# Altium PCB Gastroscopy-CutController.PcbDoc (part 2 of 3)
Units mm, origin at the board's own origin, x right, y up, seen from the top; angles counter-clockwise.
Board outline 69.5 x 69.5 mm, 4 copper layers (Top Layer, Layer 4 (GND), Layer 5 (PWR), Bottom Layer), stack 1.49 mm thick; 92 components, 63 nets, 304 pads, 96 vias.
Unrouted connection lines stored in the file: 142.
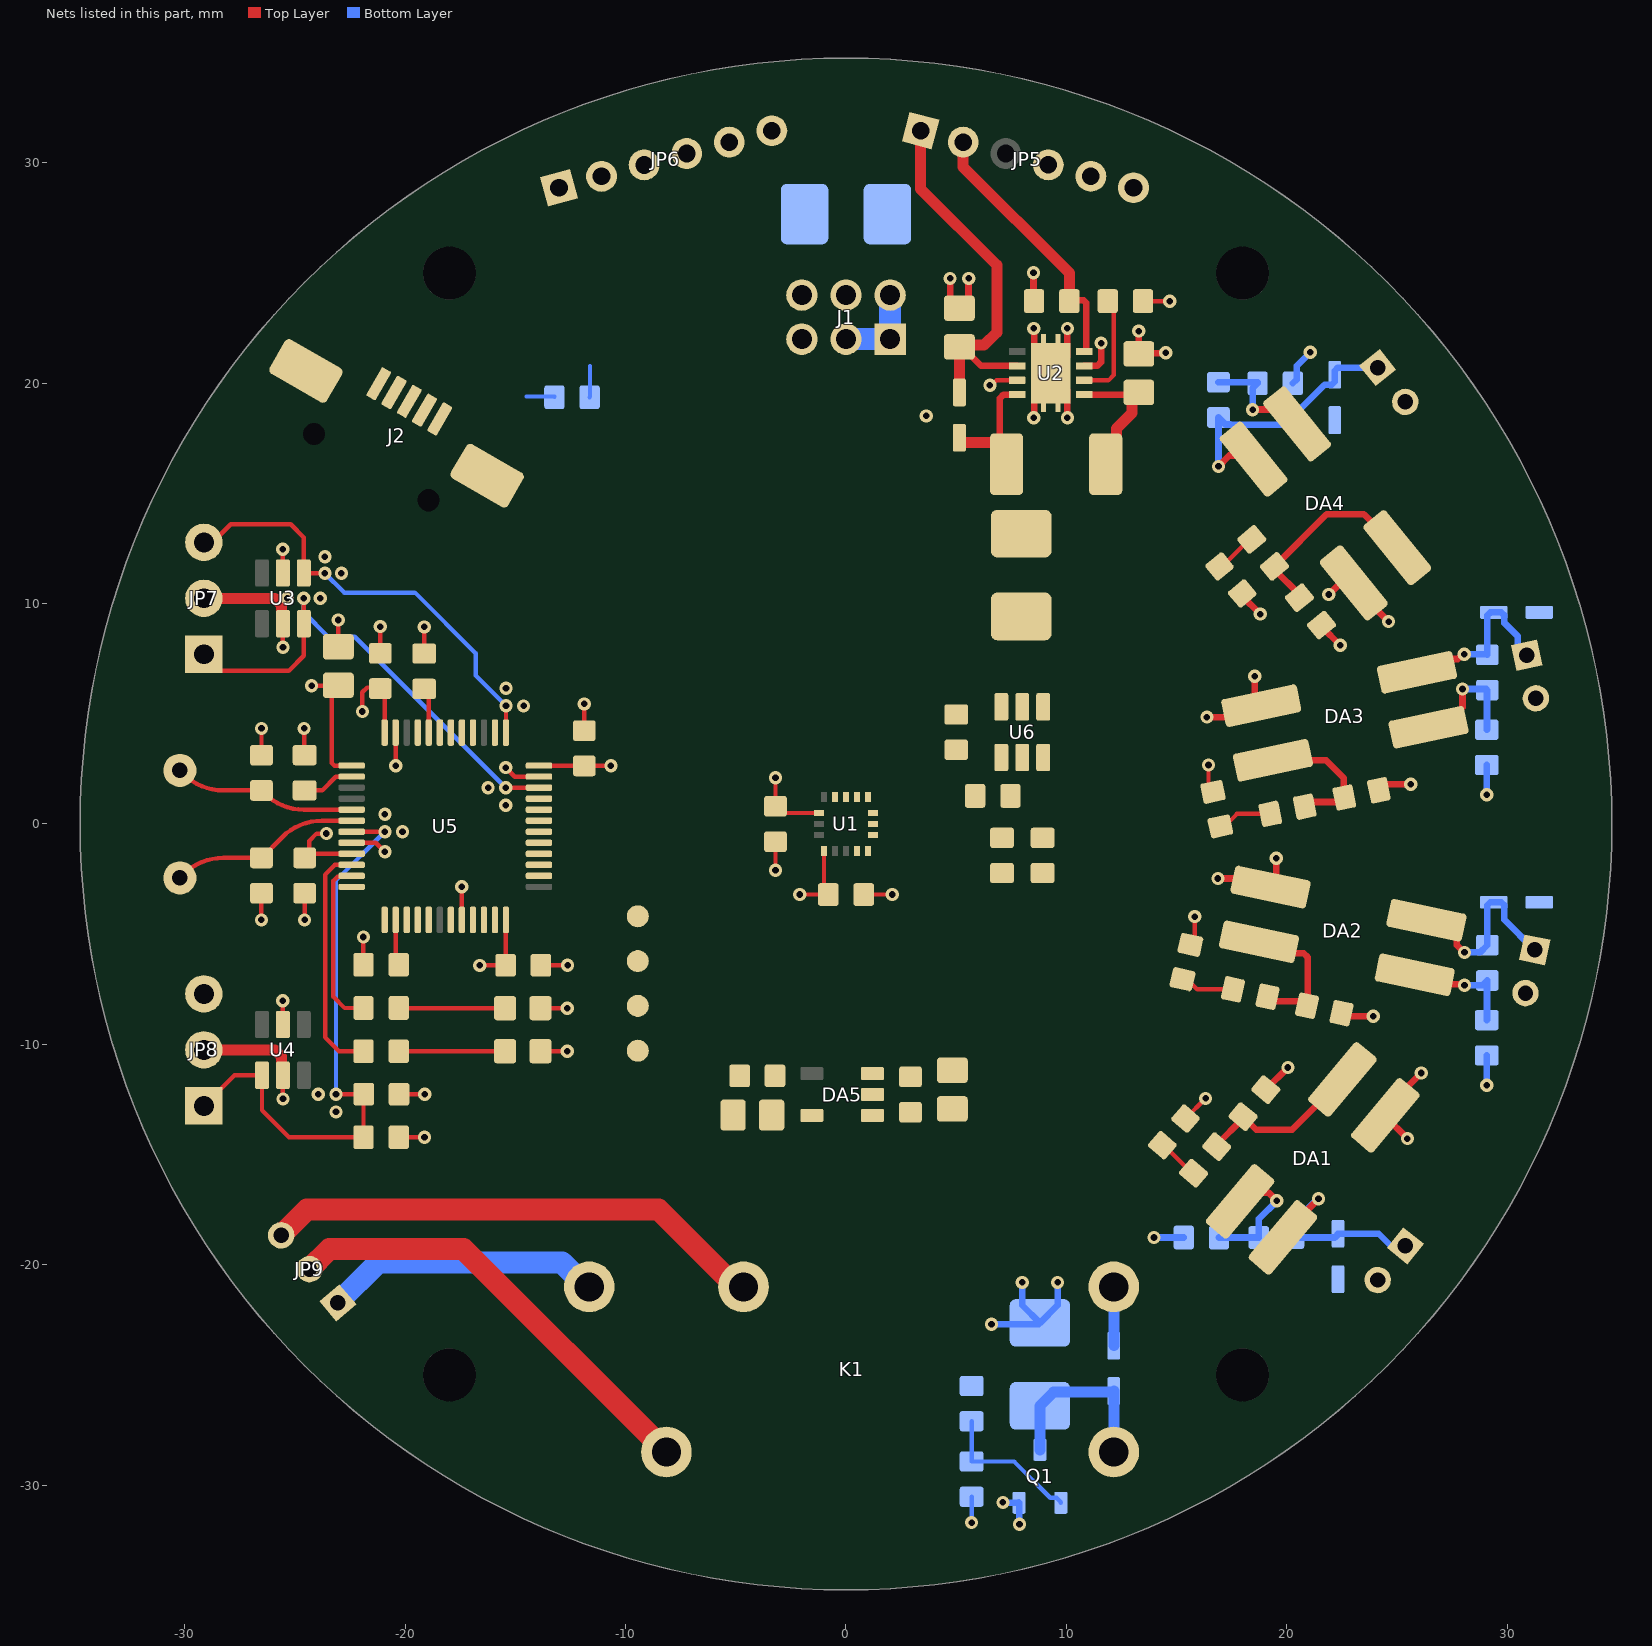
[diagram p2: the nets of this part, all layers, seen from the top]

## Part data (continued)
D1 D2 D3 D4: library part PESD5V0L1BA,115, "TVS DIODE 5VWM 33VC SOD323", Breakdown Voltage=7V, Capacitance=75pF, Clamping Voltage=33V, Leakage Current=1uA, Manufacturer 1="NXP Semiconductors", Max Breakdown Voltage=8.2V, Max Operating Temperature=150°C, Max Power Dissipation=500W, Max Surge Current=15A, Min Operating Temperature=-65°C, Operating Supply Voltage=5V, Package Quantity=1, Power Line Protection=No, Resistor Type=Zener, Supplier Part Number 1=70R7330, Test Current=5mA, Category=Uncategorized, Clamping Voltage-Max=33V, ComponentLink1Description=https://datasheet.ciiva.com/334/pesdxl1ba-ser-334048.pdf?src-supplier=Digi-Key, ComponentLink1URL=https://datasheet.ciiva.com/334/pesdxl1ba-ser-334048.pdf?src-supplier=Digi-Key, ComponentLink2Description=https://datasheet.ciiva.com/1219/682594-1219455.pdf?src-supplier=Newark, ComponentLink2URL=https://datasheet.ciiva.com/1219/682594-1219455.pdf?src-supplier=Newark, ComponentLink3Description=https://datasheet.ciiva.com/334/pesdxl1ba-ser-334050.pdf?src-supplier=Digi-Key, ComponentLink3URL=https://datasheet.ciiva.com/334/pesdxl1ba-ser-334050.pdf?src-supplier=Digi-Key, ComponentLink4Description=https://datasheet.ciiva.com/334/pesdxl1ba-ser-334051.pdf?src-supplier=Digi-Key, ComponentLink4URL=https://datasheet.ciiva.com/334/pesdxl1ba-ser-334051.pdf?src-supplier=Digi-Key, ComponentLink5Description=https://datasheet.ciiva.com/6574/pesdxl1ba-ser-6574197.pdf?src-supplier=Digi-Key, ComponentLink5URL=https://datasheet.ciiva.com/6574/pesdxl1ba-ser-6574197.pdf?src-supplier=Digi-Key, Contact Plating=Tin, Depth=1.35mm, Diode Type=ZENER, Direction=Bidirectional, Element Configuration=Single, Height=0.25inch, Lead Free="Lead Free", Length=1.8mm, Manufacturer Part Number 1=PESD5V0L1BA115, Min Breakdown Voltage=7V, Mount="Surface Mount", Number of Bidirectional Channels=1, Number of Channels=1, Number of Elements=1, Number of pins=2, Packaging="Cut Tape", Peak Pulse Current=15A, Peak Pulse Power=500W, Polarity=Bidirectional, Radiation Hardening=No, Reach SVHC Compliant=Yes, Reverse Breakdown Voltage=7V, Reverse Standoff Voltage=5V, RoHS=Yes, Series=-, Supplier 1=Newark, Termination=SMD/SMT, Weight=0.01lb, Width=0.25inch, Working Voltage=5V
D5 D8: "DIODE SCHOTTKY 40V 1A SOD323", Manufacturer=Nexperia, Supplier Part Number 1=485644P, Category="Rectifier Diodes", ComponentLink1Description=http://www.farnell.com/datasheets/689588.pdf?src-supplier=Farnell, ComponentLink1URL=http://www.farnell.com/datasheets/689588.pdf?src-supplier=Farnell, Manufacturer Part Number=PMEG4010BEA,115, Pricing 1="160=0,18400, 760=0,16200, 1500=0,13800 (GBP)", RoHS=Yes, RoHS Compliant=Yes, Stock 1=163320, Supplier 1=RSComponents
D6: "LED BLUE CLEAR CHIP SMD", Case Code (Imperial)=0603, Case Code (Metric)=1608, Color=Blue, Forward Current=20mA, Forward Voltage=2.8V, Lens Color=Colorless, Manufacturer 1="Vishay Lite-On", Max Operating Temperature=80°C, Min Operating Temperature=-20°C, Package Quantity=1, Power Dissipation=76mW, Reverse Voltage=5V, Test Current=5mA, Case/Package=0603, Category=LEDs, ComponentLink1Description=https://datasheet.ciiva.com/2111/ltst-c193tbkt-5a-2111219.pdf?src-supplier=Digi-Key, ComponentLink1URL=https://datasheet.ciiva.com/2111/ltst-c193tbkt-5a-2111219.pdf?src-supplier=Digi-Key, ComponentLink2Description=https://datasheet.ciiva.com/11773/0900766b80dc0554-11773880.pdf?src-supplier=RSComponents, ComponentLink2URL=https://datasheet.ciiva.com/11773/0900766b80dc0554-11773880.pdf?src-supplier=RSComponents, ComponentLink3Description=https://datasheet.ciiva.com/4688/lite-on-ltst-c193tbkt-5a-187386-4688832.pdf?src-supplier=Mouser, ComponentLink3URL=https://datasheet.ciiva.com/4688/lite-on-ltst-c193tbkt-5a-187386-4688832.pdf?src-supplier=Mouser, ComponentLink4Description=https://datasheet.ciiva.com/16210/ltst-c193tbkt-5a-16210824.pdf?src-supplier=Future+Electronics, ComponentLink4URL=https://datasheet.ciiva.com/16210/ltst-c193tbkt-5a-16210824.pdf?src-supplier=Future+Electronics, ComponentLink5Description=https://datasheet.ciiva.com/15201/getdatasheetpartid-293056-15201395.pdf?src-supplier=Verical, ComponentLink5URL=https://datasheet.ciiva.com/15201/getdatasheetpartid-293056-15201395.pdf?src-supplier=Verical, ComponentLink6Description=https://datasheet.ciiva.com/2111/p-100-ltst-c193tbkt-5a-2111220.pdf?src-supplier=Digi-Key, ComponentLink6URL=https://datasheet.ciiva.com/2111/p-100-ltst-c193tbkt-5a-2111220.pdf?src-supplier=Digi-Key, ComponentLink7Description=https://datasheet.ciiva.com/2111/p-100-ltst-c193tbkt-5a-2111221.pdf?src-supplier=Digi-Key, ComponentLink7URL=https://datasheet.ciiva.com/2111/p-100-ltst-c193tbkt-5a-2111221.pdf?src-supplier=Digi-Key, Depth=0.8mm, Dominant Wavelength=475nm, Height=0.35mm, Illumination Color=Blue, Lead Free="Lead Free", Length=1.6mm, Lens Style=Diffused,Colorless,Rectangular,Clear, Lens Transparency=Clear, Luminous Intensity=15mcd, Manufacturer Part Number 1=LTST-C193TBKT-5A, Mount="Surface Mount", Number of Elements=1, Number of LEDs=1, Number of pins=2, Packaging="Tape and Reel", Pricing 1="1=0.33280, 10=0.16780, 25=0.16610 (USD)", Radiation Hardening=No, RoHS=Yes, RoHS Compliant=Yes, Stock 1=226, Supplier 1="Arrow Electronics", Supplier Part Number 1=LTST-C193TBKT-5A, Viewing Angle=130°, Width=0.8mm
D7: "LED GREEN CLEAR SMD", Case Code (Imperial)=0603, Case Code (Metric)=1608, Color=Green, Forward Current=30mA, Forward Voltage=2V, Lens Color=Colorless, Manufacturer 1="Vishay Lite-On", Max Operating Temperature=85°C, Max Power Dissipation=75mW, Min Operating Temperature=-55°C, Package Quantity=1, Reverse Voltage=5V, Test Current=20mA, Case/Package=0603, Category=LEDs, ComponentLink1Description=https://datasheet.ciiva.com/2109/ltst-c191kgkt-2109973.pdf?src-supplier=Digi-Key, ComponentLink1URL=https://datasheet.ciiva.com/2109/ltst-c191kgkt-2109973.pdf?src-supplier=Digi-Key, Depth=0.8mm, Dominant Wavelength=571nm, Height=0.55mm, Illumination Color=Green, Lead Free="Lead Free", Length=1.6mm, Lens Style=Rectangular,Colorless, Lens Transparency=Clear, Luminous Intensity=35mcd, Manufacturer Part Number 1=LTST-C191KGKT, Mount="Surface Mount", Number of Elements=1, Number of LEDs=1, Number of pins=2, Packaging="Tape and Reel", Power Dissipation=75mW, Power Rating=75mW, Pricing 1="5000=0.04240, 10000=0.03360, 25000=0.02880, 50000=0.02750 (USD)", Radiation Hardening=No, RoHS=Yes, RoHS Compliant=Yes, Stock 1=10000, Supplier 1="Arrow Electronics", Supplier Part Number 1=LTST-C191KGKT, Viewing Angle=130°, Wavelength=574nm, Width=0.8mm
D9: "TVS DIODE 24VWM 38.9VC SMB", Breakdown Voltage=30.7V, Case/Package=SMB, Clamping Voltage=38.9V, Leakage Current=5uA, Manufacturer 1=Bourns, Max Operating Temperature=150°C, Max Power Dissipation=600W, Max Surge Current=100A, Min Breakdown Voltage=26.7V, Min Operating Temperature=-55°C, Operating Supply Voltage=3.5V, Package Quantity=1, Peak Pulse Current=15.4A, Power Line Protection=No, Resistor Type=Zener, Reverse Standoff Voltage=24V, Test Current=1mA, Category="TVS Diodes", ComponentLink1Description=https://datasheet.ciiva.com/30478/0900766b81189a19-30478832.pdf?src-supplier=RSComponents, ComponentLink1URL=https://datasheet.ciiva.com/30478/0900766b81189a19-30478832.pdf?src-supplier=RSComponents, ComponentLink2Description=https://datasheet.ciiva.com/3022/smbj-3022496.pdf?src-supplier=Avnet, ComponentLink2URL=https://datasheet.ciiva.com/3022/smbj-3022496.pdf?src-supplier=Avnet, ComponentLink3Description=https://datasheet.ciiva.com/3022/smbj-3022497.pdf?src-supplier=Avnet, ComponentLink3URL=https://datasheet.ciiva.com/3022/smbj-3022497.pdf?src-supplier=Avnet, ComponentLink4Description=https://datasheet.ciiva.com/342/smbj-342022.pdf?src-supplier=Digi-Key, ComponentLink4URL=https://datasheet.ciiva.com/342/smbj-342022.pdf?src-supplier=Digi-Key, ComponentLink5Description=https://datasheet.ciiva.com/8031/1677318-8031064.pdf?src-supplier=Element14, ComponentLink5URL=https://datasheet.ciiva.com/8031/1677318-8031064.pdf?src-supplier=Element14, ComponentLink6Description=https://datasheet.ciiva.com/330/littelfuse-tvs-diode-smaj-datasheet-pdf-330796.pdf?src-supplier=Digi-Key, ComponentLink6URL=https://datasheet.ciiva.com/330/littelfuse-tvs-diode-smaj-datasheet-pdf-330796.pdf?src-supplier=Digi-Key, ComponentLink7Description=https://datasheet.ciiva.com/28410/1677318-28410012.pdf?src-supplier=Element14, ComponentLink7URL=https://datasheet.ciiva.com/28410/1677318-28410012.pdf?src-supplier=Element14, ComponentLink8Description=https://datasheet.ciiva.com/342/smbj-342020.pdf?src-supplier=Digi-Key, ComponentLink8URL=https://datasheet.ciiva.com/342/smbj-342020.pdf?src-supplier=Digi-Key, ComponentLink9Description=https://datasheet.ciiva.com/342/smbj-342021.pdf?src-supplier=Digi-Key, ComponentLink9URL=https://datasheet.ciiva.com/342/smbj-342021.pdf?src-supplier=Digi-Key, ComponentLink10Description=https://datasheet.ciiva.com/16237/smbj-16237468.pdf?src-supplier=Onlinecomponents.com, ComponentLink10URL=https://datasheet.ciiva.com/16237/smbj-16237468.pdf?src-supplier=Onlinecomponents.com, ComponentLink11Description=https://datasheet.ciiva.com/48712/001056314-da-01-en-tvs-diode-smbj24a-do-214aa-bou-48712566.pdf?src-supplier=Conrad, ComponentLink11URL=https://datasheet.ciiva.com/48712/001056314-da-01-en-tvs-diode-smbj24a-do-214aa-bou-48712566.pdf?src-supplier=Conrad, Diode Type=ZENER, Direction=Unidirectional, Element Configuration=Single, ESD Protection=Yes, Height=2.42mm, Length=4.57mm, Manufacturer Part Number 1=SMBJ24A, Max Breakdown Voltage=30.7V, Max Reverse Leakage Current=5uA, Mount="Surface Mount", Number of Channels=1, Number of Elements=1, Number of pins=2, Number of Unidirectional Channels=1, Packaging="Tape and Reel", Peak Pulse Power=600W, Polarity=Unidirectional, Pricing 1="1=0,52680, 10=0,35320 (USD)", Radiation Hardening=No, REACH SVHC="No SVHC", Reverse Breakdown Voltage=26.7V, RoHS=Yes, RoHS Compliant=Yes, Series=SMBJ, Stock 1=14, Supplier 1="Arrow Electronics", Supplier Part Number 1=SMBJ24A, Termination=SMD/SMT, Width=3.94mm
D10 D11: "TVS DIODE 5VWM 9.2VC SMB", Breakdown Voltage=7.25V, Case/Package=DO-214AA, Clamping Voltage=9.2V, Leakage Current=1.6mA, Manufacturer 1=Bourns, Max Operating Temperature=150°C, Max Power Dissipation=600W, Max Surge Current=100A, Min Breakdown Voltage=6.4V, Min Operating Temperature=-55°C, Operating Supply Voltage=3.5V, Package Quantity=1, Peak Pulse Current=65.2A, Power Line Protection=No, Resistor Type=Zener, Reverse Standoff Voltage=5V, Test Current=10mA, Category="TVS Diodes", ComponentLink1Description=https://datasheet.ciiva.com/334/smbj-334706.pdf?src-supplier=Digi-Key, ComponentLink1URL=https://datasheet.ciiva.com/334/smbj-334706.pdf?src-supplier=Digi-Key, ComponentLink2Description=https://datasheet.ciiva.com/3022/smbj-3022578.pdf?src-supplier=Avnet, ComponentLink2URL=https://datasheet.ciiva.com/3022/smbj-3022578.pdf?src-supplier=Avnet, ComponentLink3Description=https://datasheet.ciiva.com/334/smbj-334707.pdf?src-supplier=Digi-Key, ComponentLink3URL=https://datasheet.ciiva.com/334/smbj-334707.pdf?src-supplier=Digi-Key, ComponentLink4Description=https://datasheet.ciiva.com/334/smbj-334708.pdf?src-supplier=Digi-Key, ComponentLink4URL=https://datasheet.ciiva.com/334/smbj-334708.pdf?src-supplier=Digi-Key, ComponentLink5Description=https://datasheet.ciiva.com/28410/1677318-28410120.pdf?src-supplier=Element14, ComponentLink5URL=https://datasheet.ciiva.com/28410/1677318-28410120.pdf?src-supplier=Element14, ComponentLink6Description=https://datasheet.ciiva.com/8031/1677318-8031161.pdf?src-supplier=Element14, ComponentLink6URL=https://datasheet.ciiva.com/8031/1677318-8031161.pdf?src-supplier=Element14, ComponentLink7Description=https://datasheet.ciiva.com/30104/smbj-30104446.pdf?src-supplier=Onlinecomponents.com, ComponentLink7URL=https://datasheet.ciiva.com/30104/smbj-30104446.pdf?src-supplier=Onlinecomponents.com, Diode Type=ZENER, Direction=Bidirectional, Element Configuration=Single, Manufacturer Part Number 1=SMBJ5.0CA, Max Breakdown Voltage=7.25V, Max Reverse Leakage Current=1.6mA, Mount="Surface Mount", Number of Bidirectional Channels=1, Number of Channels=1, Number of Elements=1, Number of pins=2, Packaging="Tape and Reel", Peak Pulse Power=600W, Polarity=Bidirectional, Pricing 1="3000=0,10850, 6000=0,10460, 15000=0,10360, 30000=0,10260 (USD)", Radiation Hardening=No, REACH SVHC="No SVHC", Reverse Breakdown Voltage=6.4V, RoHS=Yes, RoHS Compliant=Yes, Series=SMBJ, Stock 1=3000, Supplier 1="Arrow Electronics", Supplier Part Number 1=SMBJ5.0CA, Termination=SMD/SMT
DA1 DA2 DA3 DA4: "OPTOISOLATOR 5KV TRANSISTOR 4SMD", Case/Package=SMD/SMT, Collector Emitter Breakdown Voltage=70V, Collector Emitter Saturation Voltage=200mV, Collector Emitter Voltage (VCEO)=35V, Current Transfer Ratio=400%, Forward Current=50mA, Forward Voltage=1.2V, Input Current=20mA, Isolation Voltage=5kV, Manufacturer 1="Broadcom Avago", Max Operating Temperature=100°C, Max Power Dissipation=200mW, Min Operating Temperature=-30°C, Package Quantity=1000, Reverse Breakdown Voltage=6V, Supplier Part Number 1=630-HCPL-817-50CE, Approvals=UL, Category=Optocouplers, Collector-emitter Voltage-Max=200mV, ComponentLink1Description=https://datasheet.ciiva.com/32424/hcpl-817-00ae-eng-tds-32424469.pdf?src-supplier=Distrelec, ComponentLink1URL=https://datasheet.ciiva.com/32424/hcpl-817-00ae-eng-tds-32424469.pdf?src-supplier=Distrelec, ComponentLink2Description=https://datasheet.ciiva.com/4702/v02-0265en-106799-4702156.pdf?src-supplier=Mouser, ComponentLink2URL=https://datasheet.ciiva.com/4702/v02-0265en-106799-4702156.pdf?src-supplier=Mouser, Fall Time=18000ns, Input Type=DC, Lead Free="Lead Free", Manufacturer Part Number 1=HCPL-817-50CE, Max Collector Current=50mA, Max Input Current=50mA, Max Output Voltage=70V, Mount="Surface Mount", Number of Channels=1, Number of Circuits=1, Number of Elements=1, Number of pins=4, Output Current per Channel=50mA, Output Voltage=70V, Packaging="Tape and Reel", Power Dissipation=200mW, Pricing 1="1=0,55000, 10=0,35900, 50=0,35900, 100=0,23700, 1000=0,18200, 10000=0,15000 (USD)", Rise Time=18000ns, RoHS=Yes, RoHS Compliant=Yes, Series=-, Stock 1=53747, Supplier 1=Mouser
DA5: "IC REG LINEAR 3.3V 500MA SOT23-5", Case/Package=SOT-23-5, Dropout Voltage=238mV, Manufacturer 1="Texas Instruments", Max Input Voltage=5.5V, Max Operating Temperature=125°C, Max Output Voltage=3.3V, Min Operating Temperature=-40°C, Output Current=500mA, Power Supply Rejection Ratio (PSRR)=52dB, Quiescent current=31uA, Supplier Part Number 1=595-TLV75533PDBVR, Category="Voltage Regulators - Linear", ComponentLink1Description=http://www.ti.com/lit/ds/symlink/tlv755p.pdf?src-supplier=Digi-Key, ComponentLink1URL=http://www.ti.com/lit/ds/symlink/tlv755p.pdf?src-supplier=Digi-Key, ComponentLink2Description=http://www.ti.com/general/docs/suppproductinfo.tsp?distId=10&amp;gotoUrl=http%3A%2F%2Fwww.ti.com%2Flit%2Fgpn%2Ftlv755p&src-supplier=Digi-Key, ComponentLink2URL=http://www.ti.com/general/docs/suppproductinfo.tsp?distId=10&amp;gotoUrl=http%3A%2F%2Fwww.ti.com%2Flit%2Fgpn%2Ftlv755p&src-supplier=Digi-Key, Manufacturer Part Number 1=TLV75533PDBVR, Min Output Voltage=3.3V, Mount="Surface Mount", Number of Regulators=1, Output Configuration=Positive, Output Type=Fixed, Packaging="Cut Tape", Pricing 1="1=0,46000, 10=0,39400, 50=0,39400, 100=0,27300, 1000=0,17900, 10000=0,16200 (USD)", RoHS=Yes, RoHS Compliant=Yes, Stock 1=90, Supplier 1=Mouser
J1: "CONN HEADER VERT 6POS 2MM", Manufacturer 1="Connfly electronic (Zhenqin)", Contact_1=+5V, Contact_2=+5V, Contact_3=+5V, Contact_4=GND, Contact_5=GND, Contact_6=GND, Manufacturer Part Number 1=DS1026-06-2*3S8BV
J2: "CONN RCPT USB2.0 MINI B SMD R/A", Manufacturer 1="Adam Equipment", Category=Connectors, Contact Plating=Gold, Manufacturer Part Number 1=MUSB-B5-S-VT-TSMT-1, Orientation=Vertical
JP1 JP2 JP3 JP4: "CONN HEADER 2POS 2MM", Manufacturer 1="Connfly electronic (Zhenqin)", Contact_1=IN, Contact_2=GND, Manufacturer Part Number 1=DS1066-2MVW6X
JP5 JP6: "CONN PLUG 6POS 2MM", Manufacturer 1="Connfly electronic (Zhenqin)", Contact_6=GND, Manufacturer Part Number 1=DS1066-6MVW6X
  JP5: Contact_1=DRIVE_OUT, Contact_2=DRIVE_IN, Contact_3=NC, Contact_4=LED_DIM, Contact_5=5V
  JP6: Contact_1=SDA, Contact_2=SCL, Contact_3=INT, Contact_4=TOF_EN, Contact_5=3V3
JP7 JP8: "CONN HEADER 3 POS 2.54", Color=Black, Manufacturer 1="Wurth Electronics", Supplier Part Number 1=732-5316-ND, Category=Connectors, ComponentLink1Description=http://www.mouser.com/ds/2/445/6130xx11121-538006.pdf?src-supplier=Mouser, ComponentLink1URL=http://www.mouser.com/ds/2/445/6130xx11121-538006.pdf?src-supplier=Mouser, ComponentLink2Description=http://www.farnell.com/cad/1737268.pdf?src-supplier=Element14, ComponentLink2URL=http://www.farnell.com/cad/1737268.pdf?src-supplier=Element14, ComponentLink3Description=https://katalog.we-online.de/em/datasheet/6130xx11121.pdf?src-supplier=Digi-Key, ComponentLink3URL=https://katalog.we-online.de/em/datasheet/6130xx11121.pdf?src-supplier=Digi-Key, Connector Type="Male Pin", Contact Material=Copper, Contact Mating Length=0.236inch, Contact Plating=Gold, Contact Type="Male Pin", Contact_2=GND, Gender=Male, Lead Free="Lead Free", Manufacturer Part Number 1=61300311121, Mount="Through Hole", Number of Contacts=3, Number of Positions=3, Number of Rows=1, Packaging=Bulk, Pitch=0.1inch, Pricing 1="1=0,13000, 10=0,11300, 25=0,09400, 50=0,07900, 100=0,07100, 1000=0,06600 (USD)", RoHS=Yes, RoHS Compliant=Yes, Series=WR-PHD, Stock 1=199897, Supplier 1=Digi-Key, Termination=Solder
  JP7: Contact_1=SWDIO, Contact_3=SWCLK
  JP8: Contact_1=RESET, Contact_3=3V3
JP9: "CONN PLUG 3POS 2MM", Manufacturer 1="Connfly electronic (Zhenqin)", Contact_1=NO, Contact_2=COM, Contact_3=NC, Manufacturer Part Number 1=DS1066-3MVW6X
K1: "RELAY GEN PURPOSE SPDT 10A 5V", Manufacturer 1="TE Connectivity Schrack", Supplier Part Number 1=RT174005, Category="Signal Relays", ComponentLink1Description=https://datasheet.ciiva.com/2409/eng-ds-rt1-sensitive-0910-2409155.pdf?src-supplier=Avnet, ComponentLink1URL=https://datasheet.ciiva.com/2409/eng-ds-rt1-sensitive-0910-2409155.pdf?src-supplier=Avnet, ComponentLink2Description=https://datasheet.ciiva.com/14146/rt1sens-eng-datasheet-14146563.pdf?src-supplier=Distrelec, ComponentLink2URL=https://datasheet.ciiva.com/14146/rt1sens-eng-datasheet-14146563.pdf?src-supplier=Distrelec, ComponentLink3Description=https://datasheet.ciiva.com/16307/3-1393239-6-16307647.pdf?src-supplier=Future+Electronics, ComponentLink3URL=https://datasheet.ciiva.com/16307/3-1393239-6-16307647.pdf?src-supplier=Future+Electronics, ComponentLink4Description=https://datasheet.ciiva.com/14190/eng-ds-rt1-sensitive-0411-14190113.pdf?src-supplier=Avnet, ComponentLink4URL=https://datasheet.ciiva.com/14190/eng-ds-rt1-sensitive-0411-14190113.pdf?src-supplier=Avnet, ComponentLink5Description=https://datasheet.ciiva.com/30127/eng-ds-rt1-sensitive-0411-30127511.pdf?src-supplier=Onlinecomponents.com, ComponentLink5URL=https://datasheet.ciiva.com/30127/eng-ds-rt1-sensitive-0411-30127511.pdf?src-supplier=Onlinecomponents.com, Manufacturer Part Number 1=3-1393239-6, Pricing 1="1=1,30120 (USD)", RoHS=Yes, Stock 1=3333, Supplier 1="Arrow Electronics"
L1: library part NLC453232T-4R7K-PF, "FIXED IND 4.7UH 650MA 270MOHM SM", Case Code (Imperial)=1812, Case Code (Metric)=4532, Current Rating=650mA, DC Resistance (DCR)=270mR, Inductance Tolerance=10%, Inductor Type=POWER, Manufacturer=TDK, Max Operating Temperature=105°C, Min Operating Temperature=-40°C, Package Quantity=500, Resistor Type=Wirewound, Self Resonant Frequency=35MHz, Test Frequency=7.96MHz, Case/Package=1812, Category="Fixed Inductors", ComponentLink1Description=https://datasheet.ciiva.com/15160/getdatasheetpartid-200345-15160695.pdf?src-supplier=Verical, ComponentLink1URL=https://datasheet.ciiva.com/15160/getdatasheetpartid-200345-15160695.pdf?src-supplier=Verical, ComponentLink2Description=https://datasheet.ciiva.com/49516/1871457-49516870.pdf?src-supplier=Jameco, ComponentLink2URL=https://datasheet.ciiva.com/49516/1871457-49516870.pdf?src-supplier=Jameco, ComponentLink3Description=https://datasheet.ciiva.com/22622/1505805-22622665.pdf?src-supplier=Element14, ComponentLink3URL=https://datasheet.ciiva.com/22622/1505805-22622665.pdf?src-supplier=Element14, ComponentLink4Description=https://datasheet.ciiva.com/15987/e531-nlc4532-15987565.pdf?src-supplier=Onlinecomponents.com, ComponentLink4URL=https://datasheet.ciiva.com/15987/e531-nlc4532-15987565.pdf?src-supplier=Onlinecomponents.com, Core Material=Ferrite, DC Current=650mA, Depth=3.4mm, Height=3.2mm, Height - Seated (Max)=0.134inch, Inductance=4.7uH, Lead Free="Lead Free", Length=4.8mm, Manufacturer Part Number=NLC453232T-4R7K-PF, Max DC Current=650mA, Military Standard=Not, Mount="Surface Mount", Number of pins=2, Packaging="Tape and Reel", Pricing 1="500=0,20930, 1000=0,16890 (USD)", Q Factor=10, Radiation Hardening=No, Rated Current-Max=650mA, Reach SVHC Compliant=Yes, Resistance=270mR, RoHS=Yes, RoHS Compliant=Yes, Series=NLC, Shielding=Unshielded, Stock 1=6500, Supplier 1="Arrow Electronics", Supplier Part Number 1=NLC453232T-4R7K-PF, Termination=SMD/SMT, Tolerance=10%, Weight=180mg, Width=0.126inch
Q1: "MOSFET N-CH 30V 3.3A/3.6A SOT23", Case/Package=SOT-23-3, Continuous Drain Current (ID)=3.6A, Drain to Source Breakdown Voltage=30V, Drain to Source Resistance=49mR, Drain-source On Resistance-Max=60mR, Gate to Source Voltage (Vgs)=20V, Input Capacitance=35pF, Manufacturer 1="Vishay Siliconix", Max Operating Temperature=150°C, Max Power Dissipation=200mW, Min Operating Temperature=-55°C, Package Quantity=3000, Power Dissipation=1.1W, Supplier Part Number 1=SI2304DDS-T1-GE3CT-ND, Threshold Voltage=2.2V, Category=MOSFETs, ComponentLink1Description=https://datasheet.ciiva.com/5769/si2304dd-5769090.pdf?src-supplier=Farnell, ComponentLink1URL=https://datasheet.ciiva.com/5769/si2304dd-5769090.pdf?src-supplier=Farnell, ComponentLink2Description=https://datasheet.ciiva.com/7370/1750671-7370955.pdf?src-supplier=Newark, ComponentLink2URL=https://datasheet.ciiva.com/7370/1750671-7370955.pdf?src-supplier=Newark, ComponentLink3Description=https://datasheet.ciiva.com/4441/si2304dd-244438-4441695.pdf?src-supplier=Mouser, ComponentLink3URL=https://datasheet.ciiva.com/4441/si2304dd-244438-4441695.pdf?src-supplier=Mouser, ComponentLink4Description=https://datasheet.ciiva.com/2957/si2304dd-2957371.pdf?src-supplier=Digi-Key, ComponentLink4URL=https://datasheet.ciiva.com/2957/si2304dd-2957371.pdf?src-supplier=Digi-Key, ComponentLink5Description=https://datasheet.ciiva.com/7788/si2304dd-7788750.pdf?src-supplier=Element14, ComponentLink5URL=https://datasheet.ciiva.com/7788/si2304dd-7788750.pdf?src-supplier=Element14, ComponentLink6Description=https://datasheet.ciiva.com/8115/si2304dd-8115070.pdf?src-supplier=Avnet, ComponentLink6URL=https://datasheet.ciiva.com/8115/si2304dd-8115070.pdf?src-supplier=Avnet, ComponentLink7Description=https://datasheet.ciiva.com/2957/si2304dd-2957372.pdf?src-supplier=Digi-Key, ComponentLink7URL=https://datasheet.ciiva.com/2957/si2304dd-2957372.pdf?src-supplier=Digi-Key, ComponentLink8Description=https://datasheet.ciiva.com/26137/si2304dd-26137837.pdf?src-supplier=Avnet+Europe, ComponentLink8URL=https://datasheet.ciiva.com/26137/si2304dd-26137837.pdf?src-supplier=Avnet+Europe, Contact Plating=Tin,Matte, Drain to Source Voltage (Vdss)=30V, Element Configuration=Single, Fall Time=22ns, Lead Free="Lead Free", Manufacturer Part Number 1=SI2304DDS-T1-GE3, Mount="Surface Mount", Nominal Vgs=2.2V, Number of Channels=1, Number of Elements=1, Number of pins=3, On-State Resistance=60mR, Packaging="Tape and Reel", Polarity=N-CHANNEL, Pricing 1="1=0,45000, 10=0,36200, 100=0,24640, 500=0,18480, 1000=0,13860 (USD)", Radiation Hardening=No, Rds On Max=850mR, REACH SVHC="No SVHC", Rise Time=50ns, RoHS=Yes, RoHS Compliant=Yes, Series=TrenchFET®, Stock 1=5879, Supplier 1=Digi-Key, Turn-Off Delay Time=12ns, Turn-On Delay Time=12ns, Weight=0.050717oz
R1 R14 R17 R18 R21 R23: library part RC0603FR-0710KL, "RES 10K OHM 1% 1/10W 0603", Case Code (Imperial)=0603, Case Code (Metric)=1608, Manufacturer 1=Yageo, Max Operating Temperature=155°C, Max Power Dissipation=100mW, Min Operating Temperature=-55°C, Resistance Tolerance=1%, Resistor Type="Thick Film", Temperature Coefficient=100ppm/°C, Voltage Rating=75V, Voltage Rating (DC)=50V, Case/Package=0603, Category="Chip SMD Resistors", ComponentLink1Description=https://datasheet.ciiva.com/7660/38590-7660789.pdf?src-supplier=Element14, ComponentLink1URL=https://datasheet.ciiva.com/7660/38590-7660789.pdf?src-supplier=Element14, ComponentLink2Description=https://datasheet.ciiva.com/7983/443971-7983596.pdf?src-supplier=Element14, ComponentLink2URL=https://datasheet.ciiva.com/7983/443971-7983596.pdf?src-supplier=Element14, ComponentLink3Description=https://datasheet.ciiva.com/22747/443971-22747519.pdf?src-supplier=Element14, ComponentLink3URL=https://datasheet.ciiva.com/22747/443971-22747519.pdf?src-supplier=Element14, ComponentLink4Description=https://datasheet.ciiva.com/46440/1868787-46440891.pdf?src-supplier=Element14, ComponentLink4URL=https://datasheet.ciiva.com/46440/1868787-46440891.pdf?src-supplier=Element14, ComponentLink5Description=https://datasheet.ciiva.com/7746/1738695-7746239.pdf?src-supplier=Element14, ComponentLink5URL=https://datasheet.ciiva.com/7746/1738695-7746239.pdf?src-supplier=Element14, Construction=Rectangular, Depth=0.8mm, Features="Moisture Resistant", Height=0.45mm, Lead Free="Lead Free", Lead Pitch=0.3mm, Length=1.6mm, Manufacturer Part Number 1=RC0603FR-0710KL, Military Standard=Not, Number of pins=2, Number of Terminations=2, Packaging="Tape and Reel", Power Rating=100mW, Pricing 1="5000=0,00240 (USD)", REACH SVHC=Unknown, Resistance=10kR, RoHS=Yes, RoHS Compliant=Yes, Series=RC, Size Code=0603, Stock 1=4950000, Supplier 1="Arrow Electronics", Supplier Part Number 1=RC0603FR-0710KL, Termination=SMD/SMT, Tolerance=1%, Weight=7.1E-05oz, Width=0.8mm
R2 R5 R8 R11 R20: library part RC0603FR-07360RL, "RES 360 OHM 1% 1/10W 0603", Case Code (Imperial)=0603, Case Code (Metric)=1608, Manufacturer 1=Yageo, Max Operating Temperature=155°C, Max Power Dissipation=100mW, Min Operating Temperature=-55°C, Package Quantity=1, Resistor Type="Thick Film", Temperature Coefficient=100ppm/°C, Tolerance=1%, Voltage Rating=50V, Case/Package=0603, Category="Chip SMD Resistors", ComponentLink1Description=https://datasheet.ciiva.com/2454/pyu-r-int-thick-7-2454271.pdf?src-supplier=Digi-Key, ComponentLink1URL=https://datasheet.ciiva.com/2454/pyu-r-int-thick-7-2454271.pdf?src-supplier=Digi-Key, ComponentLink2Description=https://datasheet.ciiva.com/2454/pyu-r-int-thick-7-2454272.pdf?src-supplier=Digi-Key, ComponentLink2URL=https://datasheet.ciiva.com/2454/pyu-r-int-thick-7-2454272.pdf?src-supplier=Digi-Key, ComponentLink3Description=https://datasheet.ciiva.com/2454/pyu-r-int-thick-7-2454270.pdf?src-supplier=Digi-Key, ComponentLink3URL=https://datasheet.ciiva.com/2454/pyu-r-int-thick-7-2454270.pdf?src-supplier=Digi-Key, ComponentLink4Description=https://datasheet.ciiva.com/12558/rc0603-272842-12558645.pdf?src-supplier=Mouser, ComponentLink4URL=https://datasheet.ciiva.com/12558/rc0603-272842-12558645.pdf?src-supplier=Mouser, Construction=Rectangular, Depth=0.8mm, Features="Moisture Resistant", Height=0.022inch, Lead Free="Lead Free", Length=1.6mm, Manufacturer Part Number 1=RC0603FR-07360RL, Military Standard=Not, Number of Terminations=2, Packaging="Tape and Reel", Power Rating=100mW, Pricing 1="1=0,05320, 10=0,01120, 100=0,00760, 250=0,00660, 1000=0,00380, 3000=0,00370, 6000=0,00230 (USD)", Resistance=360R, RoHS=Yes, RoHS Compliant=Yes, Series=RC, Size Code=0603, Stock 1=7884, Supplier 1="Arrow Electronics", Supplier Part Number 1=RC0603FR-07360RL, Termination=SMD/SMT, Voltage Rating (DC)=50V, Width=0.031inch
R3 R6 R9 R12: library part RC0603FR-071KL, "RES 1K OHM 1% 1/10W 0603", Case Code (Imperial)=0603, Case Code (Metric)=1608, Manufacturer 1=Yageo, Max Operating Temperature=155°C, Max Power Dissipation=100mW, Min Operating Temperature=-55°C, Resistance Tolerance=1%, Resistor Type="Thick Film", Temperature Coefficient=100ppm/°C, Voltage Rating=50V, Case/Package=0603, Category="Chip SMD Resistors", Construction=Rectangular, Contact Plating=Tin,Matte, Depth=0.8mm, Features="Moisture Resistant", Height=0.45mm, Lead Free="Lead Free", Length=1.6mm, Manufacturer Part Number 1=RC0603FR-071KL, Military Standard=Not, Number of Terminations=2, Packaging="Tape and Reel", Power Rating=100mW, Pricing 1="5000=0,00240, 10000=0,00230, 25000=0,00220, 125000=0,00190 (USD)", Radiation Hardening=No, REACH SVHC="No SVHC", Resistance=1kR, RoHS=Yes, RoHS Compliant=Yes, Series=RC, Size Code=0603, Stock 1=480000, Supplier 1="Arrow Electronics", Supplier Part Number 1=RC0603FR-071KL, Technology="THICK FILM", Termination=SMD/SMT, Tolerance=1%
R4 R7 R10 R13 R19 R22: library part RC0603FR-07100RL, "RES 100 OHM 1% 1/10W 0603", Case Code (Imperial)=0603, Case Code (Metric)=1608, Manufacturer 1=Yageo, Max Operating Temperature=155°C, Max Power Dissipation=100mW, Min Operating Temperature=-55°C, Resistance Tolerance=1%, Resistor Type="Thick Film", Temperature Coefficient=100ppm/°C, Voltage Rating=50V, Case/Package=0603, Category="Chip SMD Resistors", Construction=Rectangular, Depth=0.8mm, Features="Moisture Resistant", Height=0.45mm, Lead Free="Lead Free", Length=1.6mm, Manufacturer Part Number 1=RC0603FR-07100RL, Military Standard=Not, Number of pins=2, Number of Terminations=2, Packaging="Tape and Reel", Power Rating=100mW, Pricing 1="5000=0,00180 (USD)", REACH SVHC=Unknown, Resistance=100R, RoHS=Yes, RoHS Compliant=Yes, Series=RC, Size Code=0603, Stock 1=17580000, Supplier 1="Arrow Electronics", Supplier Part Number 1=RC0603FR-07100RL, Technology="THICK FILM", Termination=SMD/SMT, Tolerance=1%, Voltage Rating (DC)=50V, Width=0.8mm
R15: library part RC0603FR-0762KL, "RES 62K OHM 1% 1/10W 0603", Case Code (Imperial)=0603, Case Code (Metric)=1608, Manufacturer=Yageo, Max Operating Temperature=155°C, Max Power Dissipation=100mW, Min Operating Temperature=-55°C, Package Quantity=1, Resistor Type="Thick Film", Temperature Coefficient=100ppm/°C, Tolerance=1%, Voltage Rating=50V, Case/Package=0603, Category="Chip SMD Resistors", ComponentLink1Description=https://datasheet.ciiva.com/2454/pyu-r-int-thick-7-2454127.pdf?src-supplier=Digi-Key, ComponentLink1URL=https://datasheet.ciiva.com/2454/pyu-r-int-thick-7-2454127.pdf?src-supplier=Digi-Key, ComponentLink2Description=https://datasheet.ciiva.com/2454/pyu-r-int-thick-7-2454128.pdf?src-supplier=Digi-Key, ComponentLink2URL=https://datasheet.ciiva.com/2454/pyu-r-int-thick-7-2454128.pdf?src-supplier=Digi-Key, ComponentLink3Description=https://datasheet.ciiva.com/2454/pyu-r-int-thick-7-2454126.pdf?src-supplier=Digi-Key, ComponentLink3URL=https://datasheet.ciiva.com/2454/pyu-r-int-thick-7-2454126.pdf?src-supplier=Digi-Key, ComponentLink4Description=https://datasheet.ciiva.com/12558/rc0603-272842-12558365.pdf?src-supplier=Mouser, ComponentLink4URL=https://datasheet.ciiva.com/12558/rc0603-272842-12558365.pdf?src-supplier=Mouser, Construction=Rectangular, Depth=0.8mm, Features="Moisture Resistant", Height=0.022inch, Lead Free="Lead Free", Length=1.6mm, Manufacturer Part Number=RC0603FR-0762KL, Military Standard=Not, Number of Terminations=2, Packaging="Tape and Reel", Power Rating=100mW, Pricing 1="5000=0,00133, 10000=0,00131, 20000=0,00127 (USD)", Resistance=62kR, RoHS=Yes, RoHS Compliant=Yes, Series=RC, Size Code=0603, Stock 1=75000, Supplier 1=Avnet, Supplier Part Number 1=RC0603FR-0762KL, Termination=SMD/SMT, Voltage Rating (DC)=50V, Width=0.031inch
R16: library part RC0603FR-0710RL, "RES 10 OHM 1% 1/10W 0603", Case Code (Imperial)=0603, Case Code (Metric)=1608, Manufacturer=Yageo, Max Operating Temperature=155°C, Max Power Dissipation=100mW, Min Operating Temperature=-55°C, Resistance Tolerance=1%, Resistor Type="Thick Film", Supplier Part Number 1=1995445, Temperature Coefficient=200ppm/°C, Voltage Rating=50V, Case/Package=0603, Category="Chip SMD Resistors", ComponentLink1Description=https://datasheet.ciiva.com/11808/0900766b80f96399-11808140.pdf?src-supplier=RSComponents, ComponentLink1URL=https://datasheet.ciiva.com/11808/0900766b80f96399-11808140.pdf?src-supplier=RSComponents, ComponentLink2Description=https://datasheet.ciiva.com/7746/443971-7746245.pdf?src-supplier=Element14, ComponentLink2URL=https://datasheet.ciiva.com/7746/443971-7746245.pdf?src-supplier=Element14, ComponentLink3Description=https://datasheet.ciiva.com/8891/pyu-rc0603-51-rohs-l-4-8891285.pdf?src-supplier=Avnet, ComponentLink3URL=https://datasheet.ciiva.com/8891/pyu-rc0603-51-rohs-l-4-8891285.pdf?src-supplier=Avnet, Construction=Rectangular, Contact Plating=Tin,Matte, Depth=0.8mm, Features="Moisture Resistant", Height=0.45mm, Lead Free="Lead Free", Length=1.6mm, Manufacturer Part Number=RC0603FR-0710RL, Military Standard=Not, Number of pins=2, Number of Terminations=2, Packaging="Tape and Reel", Power Rating=100mW, Pricing 1="100=0,01600, 1000=0,01500, 2500=0,01400, 5000=0,01300, 10000=0,01200 (GBP)", Radiation Hardening=No, Reach SVHC Compliant=Yes, Resistance=10R, RoHS=Yes, RoHS Compliant=Yes, Series=RC, Size Code=0603, Stock 1=6700, Supplier 1=RSComponents, Technology="THICK FILM", Termination=SMD/SMT, Tolerance=1%, Voltage Rating (DC)=50V, Width=0.8mm
R24 R25: library part RC0603FR-0724RL, "RES 24 OHM 1% 1/10W 0603", Case Code (Imperial)=0603, Case Code (Metric)=1608, Manufacturer 1=Yageo, Max Operating Temperature=155°C, Max Power Dissipation=100mW, Min Operating Temperature=-55°C, Temperature Coefficient=100ppm/°C, Tolerance=1%, Voltage Rating=50V, Working Voltage=75V, Case/Package=0603, Category="Chip SMD Resistors", Features="Moisture Resistant", Lead Free="Lead Free", Manufacturer Part Number 1=RC0603FR-0724RL, Number of Terminations=2, Packaging="Tape and Reel", Power Rating=100mW, Pricing 1="5000=0,00190, 125000=0,00160 (USD)", Resistance=24R, RoHS=Yes, RoHS Compliant=Yes, Series=RC, Stock 1=90000, Supplier 1="Arrow Electronics", Supplier Part Number 1=RC0603FR-0724RL, Termination=SMD/SMT, Voltage Rating (DC)=50V
R26: library part RC0603FR-071K5L, "RES 1.5K OHM 1% 1/10W 0603", Case Code (Imperial)=0603, Case Code (Metric)=1608, Manufacturer 1=Yageo, Max Operating Temperature=155°C, Max Power Dissipation=100mW, Min Operating Temperature=-55°C, Package Quantity=1, Resistance Tolerance=1%, Resistor Type="Thick Film", Temperature Coefficient=100ppm/°C, Voltage Rating=50V, Case/Package=0603, Category="Chip SMD Resistors", ComponentLink1Description=https://datasheet.ciiva.com/46440/1868787-46440895.pdf?src-supplier=Element14, ComponentLink1URL=https://datasheet.ciiva.com/46440/1868787-46440895.pdf?src-supplier=Element14, ComponentLink2Description=https://datasheet.ciiva.com/2454/pyu-r-int-thick-7-2454514.pdf?src-supplier=Digi-Key, ComponentLink2URL=https://datasheet.ciiva.com/2454/pyu-r-int-thick-7-2454514.pdf?src-supplier=Digi-Key, ComponentLink3Description=https://datasheet.ciiva.com/2454/pyu-r-int-thick-7-2454515.pdf?src-supplier=Digi-Key, ComponentLink3URL=https://datasheet.ciiva.com/2454/pyu-r-int-thick-7-2454515.pdf?src-supplier=Digi-Key, ComponentLink4Description=https://datasheet.ciiva.com/2454/pyu-r-int-thick-7-2454513.pdf?src-supplier=Digi-Key, ComponentLink4URL=https://datasheet.ciiva.com/2454/pyu-r-int-thick-7-2454513.pdf?src-supplier=Digi-Key, Construction=Rectangular, Depth=0.8mm, Features="Moisture Resistant", Height=0.022inch, Lead Free="Lead Free", Length=0.063inch, Manufacturer Part Number 1=RC0603FR-071K5L, Military Standard=Not, Number of pins=2, Number of Terminations=2, Packaging="Tape and Reel", Power Rating=100mW, Pricing 1="5000=0,00350 (USD)", REACH SVHC="No SVHC", Resistance=1.5kR, RoHS=Yes, RoHS Compliant=Yes, Series=RC, Size Code=0603, Stock 1=15000, Supplier 1="Arrow Electronics", Supplier Part Number 1=RC0603FR-071K5L, Termination=SMD/SMT, Tolerance=1%, Voltage Rating (DC)=50V, Width=0.031inch
R27: library part RC0603FR-07100KL, "RES SMD 100K OHM 1% 1/10W 0603", Case Code (Imperial)=0603, Case Code (Metric)=1608, Manufacturer 1=Yageo, Max Operating Temperature=155°C, Max Power Dissipation=100mW, Min Operating Temperature=-55°C, Resistance Tolerance=1%, Resistor Type="Thick Film", Temperature Coefficient=100ppm/°C, Voltage Rating=50V, Working Voltage=75V, Case/Package=0603, Category="Chip SMD Resistors", Construction=Rectangular, Depth=0.8mm, Features="Moisture Resistant", Height=0.45mm, Lead Free="Lead Free", Length=1.6mm, Manufacturer Part Number 1=RC0603FR-07100KL, Military Standard=Not, Number of pins=2, Number of Terminations=2, Packaging="Tape and Reel", Power Rating=100mW, Pricing 1="5000=0,00133, 10000=0,00131, 20000=0,00127 (USD)", Reach SVHC Compliant=Yes, Resistance=100kR, RoHS=Yes, RoHS Compliant=Yes, Series=RC, Stock 1=2113000, Supplier 1=Avnet, Supplier Part Number 1=RC0603FR-07100KL, Technology="THICK FILM", Termination=SMD/SMT, Tolerance=1%, Voltage Rating (DC)=50V, Width=0.8mm
TP1 TP2 TP3 TP4: "STM TEST POINT"
U1: "ACCEL 2-16G I2C/SPI 16LGA", Case/Package=LGA, Manufacturer 1=STMicroelectronics, Max Operating Temperature=85°C, Max Supply Voltage=3.6V, Min Operating Temperature=-40°C, Min Supply Voltage=1.71V, Operating Supply Current=11uA, Operating Supply Voltage=2.5V, Package Quantity=4000, Supplier Part Number 1=9001914, Axis="X, Y, Z", Bandwidth=5kHz, Category=Accelerometers, ComponentLink1Description=https://datasheet.ciiva.com/7621/1718591-7621744.pdf?src-supplier=Element14, ComponentLink1URL=https://datasheet.ciiva.com/7621/1718591-7621744.pdf?src-supplier=Element14, ComponentLink2Description=https://datasheet.ciiva.com/5296/cd00274221-117431-5296513.pdf?src-supplier=Mouser, ComponentLink2URL=https://datasheet.ciiva.com/5296/cd00274221-117431-5296513.pdf?src-supplier=Mouser, ComponentLink3Description=https://datasheet.ciiva.com/2810/cd00274221-2810009.pdf?src-supplier=Digi-Key, ComponentLink3URL=https://datasheet.ciiva.com/2810/cd00274221-2810009.pdf?src-supplier=Digi-Key, ComponentLink4Description=https://datasheet.ciiva.com/2810/cd00274221-2810008.pdf?src-supplier=Digi-Key, ComponentLink4URL=https://datasheet.ciiva.com/2810/cd00274221-2810008.pdf?src-supplier=Digi-Key, ComponentLink5Description=https://datasheet.ciiva.com/2810/cd00274221-2810010.pdf?src-supplier=Digi-Key, ComponentLink5URL=https://datasheet.ciiva.com/2810/cd00274221-2810010.pdf?src-supplier=Digi-Key, ComponentLink6Description=https://datasheet.ciiva.com/48495/cd00274221-48495849.pdf?src-supplier=Avnet, ComponentLink6URL=https://datasheet.ciiva.com/48495/cd00274221-48495849.pdf?src-supplier=Avnet, ComponentLink7Description=https://datasheet.ciiva.com/3271/cd00274221-3271807.pdf?src-supplier=Avnet, ComponentLink7URL=https://datasheet.ciiva.com/3271/cd00274221-3271807.pdf?src-supplier=Avnet, ComponentLink8Description=https://datasheet.ciiva.com/16216/cd00274221-16216362.pdf?src-supplier=Future+Electronics, ComponentLink8URL=https://datasheet.ciiva.com/16216/cd00274221-16216362.pdf?src-supplier=Future+Electronics, Contact Plating=Gold, Depth=3mm, Height=1mm, Interface=I2C,SPI, Lead Free="Lead Free", Length=3mm, Manufacturer Part Number 1=LIS3DHTR, Max Supply Voltage (DC)=3.6V, Min Supply Voltage (DC)=1.71V, Number of pins=16, Output Type=Digital, Packaging="Tape and Reel", Pricing 1="4000=0,99000 (USD)", Radiation Hardening=No, Reach SVHC Compliant=Yes, Resolution=16b, RoHS=Yes, RoHS Compliant=Yes, Sensor Type="3 Axis", Series=-, Supplier 1="Future Electronics", Width=3mm
U2: "IC LED DRVR RGLTR PWM 20MA 8QFN", Case/Package=QFN, Manufacturer 1=STMicroelectronics, Max Input Voltage=5.5V, Max Operating Temperature=85°C, Max Supply Current=1.2mA, Min Input Voltage=3V, Min Operating Temperature=-40°C, Output Current=20mA, Output Voltage=37V, Package Quantity=1, Category="Power Supply Modules", ComponentLink1Description=https://datasheet.ciiva.com/16491/cd00098098-16491024.pdf?src-supplier=Future+Electronics, ComponentLink1URL=https://datasheet.ciiva.com/16491/cd00098098-16491024.pdf?src-supplier=Future+Electronics, ComponentLink2Description=https://datasheet.ciiva.com/41457/001186075-da-01-en-ic-led-driver-white-stld40dpur-qfn-8-stm-41457402.pdf?src-supplier=Conrad, ComponentLink2URL=https://datasheet.ciiva.com/41457/001186075-da-01-en-ic-led-driver-white-stld40dpur-qfn-8-stm-41457402.pdf?src-supplier=Conrad, ComponentLink3Description=https://datasheet.ciiva.com/1945/cd00098098-1945372.pdf?src-supplier=Digi-Key, ComponentLink3URL=https://datasheet.ciiva.com/1945/cd00098098-1945372.pdf?src-supplier=Digi-Key, ComponentLink4Description=https://datasheet.ciiva.com/1945/cd00098098-1945373.pdf?src-supplier=Digi-Key, ComponentLink4URL=https://datasheet.ciiva.com/1945/cd00098098-1945373.pdf?src-supplier=Digi-Key, ComponentLink5Description=https://datasheet.ciiva.com/1945/cd00098098-1945374.pdf?src-supplier=Digi-Key, ComponentLink5URL=https://datasheet.ciiva.com/1945/cd00098098-1945374.pdf?src-supplier=Digi-Key, Efficiency=80%, Lead Free="Lead Free", Manufacturer Part Number 1=STLD40DPUR, Mount="Surface Mount", Number of Outputs=1, Number of pins=8, Operating Supply Voltage=5.5V, Output Current per Channel=20mA, Output Type=Adjustable, Packaging="Tape and Reel", Pricing 1="1=2,55430, 10=2,53990, 25=2,52560, 100=2,51140, 250=2,49700, 500=2,48270, 1000=2,46850, 3000=2,45410, 6000=2,43980 (USD)", Radiation Hardening=No, Reach SVHC Compliant=No, RoHS=Yes, RoHS Compliant=Yes, Series=-, Stock 1=11940, Supplier 1="Arrow Electronics", Supplier Part Number 1=STLD40DPUR, Topology=Boost
U3 U4: "TVS DIODE 5VWM 17.5VC SOT23-6", Manufacturer 1="Sangdest Microelectronics", Supplier Part Number 1=1655-1653-1-ND, Category="TVS Diodes", Manufacturer Part Number 1=SRV05-4ATR, Pricing 1="1=0,45000, 10=0,36700, 100=0,24990, 500=0,18744, 1000=0,14058 (USD)", RoHS=No, Stock 1=31500, Supplier 1=Digi-Key
U5: "IC MCU 32BIT 128KB FLASH 48LQFP", Case/Package=LQFP, Frequency=72MHz, Manufacturer 1=STMicroelectronics, Max Operating Temperature=85°C, Max Power Dissipation=363mW, Max Supply Voltage=3.6V, Min Operating Temperature=-40°C, Min Supply Voltage=2V, Package Quantity=250, Supplier Part Number 1=1104749, Address Bus Width=32b, Category=Microcontrollers, ComponentLink1Description=https://datasheet.ciiva.com/23669/1714663-23669200.pdf?src-supplier=Newark, ComponentLink1URL=https://datasheet.ciiva.com/23669/1714663-23669200.pdf?src-supplier=Newark, ComponentLink2Description=https://datasheet.ciiva.com/15122/getdatasheetpartid-92132-15122195.pdf?src-supplier=Verical, ComponentLink2URL=https://datasheet.ciiva.com/15122/getdatasheetpartid-92132-15122195.pdf?src-supplier=Verical, ComponentLink3Description=https://datasheet.ciiva.com/5752/cd00161566-5752838.pdf?src-supplier=Farnell, ComponentLink3URL=https://datasheet.ciiva.com/5752/cd00161566-5752838.pdf?src-supplier=Farnell, ComponentLink4Description=https://datasheet.ciiva.com/14100/pustm-arm-microcont-stm32f103-en-14100509.pdf?src-supplier=Distrelec, ComponentLink4URL=https://datasheet.ciiva.com/14100/pustm-arm-microcont-stm32f103-en-14100509.pdf?src-supplier=Distrelec, ComponentLink5Description=https://datasheet.ciiva.com/1502/cd00161566-1502328.pdf?src-supplier=Digi-Key, ComponentLink5URL=https://datasheet.ciiva.com/1502/cd00161566-1502328.pdf?src-supplier=Digi-Key, ComponentLink6Description=https://datasheet.ciiva.com/4840/cd00161566-4840398.pdf?src-supplier=Mouser, ComponentLink6URL=https://datasheet.ciiva.com/4840/cd00161566-4840398.pdf?src-supplier=Mouser, ComponentLink7Description=https://datasheet.ciiva.com/16219/cd00161566-16219150.pdf?src-supplier=Future+Electronics, ComponentLink7URL=https://datasheet.ciiva.com/16219/cd00161566-16219150.pdf?src-supplier=Future+Electronics, Contact Plating=Gold, Core Architecture=ARM, Data Bus Width=32b, Density=128KB, Height=1.45mm, Interface=I2C,SPI,USB,CAN,IrDA,UART,USART,LIN, Lead Free="Lead Free", Length=7mm, Manufacturer Part Number 1=STM32F103CBT6, Max Frequency=72MHz, Memory Size=128KB, Memory Type=FLASH, Number of ADC Channels=10, Number of Bits=32, Number of I2C Channels=2, Number of I/Os=37, Number of pins=48, Number of Programmable I/O=37, Number of PWM Channels=12, Number of SPI Channels=2, Number of Timers/Counters=4, Oscillator Type=Internal, Packaging=Tray, Peripherals="POR,PWM,WDT,DMA,Temp Sensor,I2C", Pricing 1="250=8,08000 (USD)", Radiation Hardening=No, RAM Size=20KB, Reach SVHC Compliant=Yes, RoHS=Yes, RoHS Compliant=Yes, Series="STM32 F1", Supplier 1="Future Electronics", Termination=SMD/SMT, Watchdog Timer=Yes, Width=7.2mm
U6: "TVS DIODE 5.25VWM 17VC SOT23-6", Breakdown Voltage=6V, Capacitance=3.5pF, Case/Package=SOT-23, Clamping Voltage=17V, Leakage Current=150nA, Manufacturer 1=STMicroelectronics, Max Operating Temperature=125°C, Min Operating Temperature=-40°C, Operating Supply Voltage=1.1V, Package Quantity=3000, Peak Pulse Current=5A, Power Line Protection=Yes, Reverse Standoff Voltage=5.25V, Supplier Part Number 1=497-5235-6-ND, Test Current=1mA, Working Voltage=5V, Category="TVS Diodes", Clamping Voltage-Max=17V, ComponentLink1Description=https://datasheet.ciiva.com/1268/1690354-1268384.pdf?src-supplier=Element14, ComponentLink1URL=https://datasheet.ciiva.com/1268/1690354-1268384.pdf?src-supplier=Element14, ComponentLink2Description=https://datasheet.ciiva.com/4508/cd00050750-113117-4508433.pdf?src-supplier=Mouser, ComponentLink2URL=https://datasheet.ciiva.com/4508/cd00050750-113117-4508433.pdf?src-supplier=Mouser, ComponentLink3Description=https://datasheet.ciiva.com/15143/getdatasheetpartid-148465-15143789.pdf?src-supplier=Verical, ComponentLink3URL=https://datasheet.ciiva.com/15143/getdatasheetpartid-148465-15143789.pdf?src-supplier=Verical, ComponentLink4Description=https://datasheet.ciiva.com/16200/cd00050750-16200026.pdf?src-supplier=Future+Electronics, ComponentLink4URL=https://datasheet.ciiva.com/16200/cd00050750-16200026.pdf?src-supplier=Future+Electronics, ComponentLink5Description=https://datasheet.ciiva.com/41444/001184109-da-01-en-ic-esd-protecti-usblc6-2sc6-sot-23-6-stm-41444156.pdf?src-supplier=Conrad, ComponentLink5URL=https://datasheet.ciiva.com/41444/001184109-da-01-en-ic-esd-protecti-usblc6-2sc6-sot-23-6-stm-41444156.pdf?src-supplier=Conrad, Contact Plating=Tin,Matte, Data Rate=480Mbps, Depth=1.75mm, Direction=Unidirectional,Bidirectional, Element Configuration=Dual, ESD Protection=Yes, Height=1.3mm, Lead Free="Lead Free", Length=3.05mm, Manufacturer Part Number 1=USBLC6-2SC6, Max Breakdown Voltage=6V, Max Reverse Leakage Current=150nA, Min Breakdown Voltage=6V, Mount="Surface Mount", Number of Bidirectional Channels=2, Number of Channels=2, Number of Elements=1, Number of pins=6, Packaging="Tape and Reel", Polarity=Unidirectional,Bidirectional, Pricing 1="1=0.63000, 10=0.54200, 100=0.40440, 500=0.31774, 1000=0.24553 (USD)", Radiation Hardening=No, REACH SVHC="No SVHC", Reverse Breakdown Voltage=6V, RoHS=Yes, RoHS Compliant=Yes, Series=USB, Supplier 1=Digi-Key, Termination=SMD/SMT, Width=1.75mm
Y1: library part ATS080B-E, "CRYSTAL 8.0000MHZ 18PF TH", ESR (Equivalent Series Resistance)=60R, Frequency Stability=50ppm, Frequency Tolerance=30ppm, Load Capacitance=18pF, Manufacturer 1=CTS, Max Operating Temperature=85°C, Min Operating Temperature=-40°C, Package Quantity=100, Category=Crystals, ComponentLink1Description=https://datasheet.ciiva.com/859/008-0309-0-859649.pdf?src-supplier=Digi-Key, ComponentLink1URL=https://datasheet.ciiva.com/859/008-0309-0-859649.pdf?src-supplier=Digi-Key, ComponentLink2Description=https://datasheet.ciiva.com/3176/008-0309-0-3176342.pdf?src-supplier=Avnet, ComponentLink2URL=https://datasheet.ciiva.com/3176/008-0309-0-3176342.pdf?src-supplier=Avnet, ComponentLink3Description=https://datasheet.ciiva.com/4945/008-0309-0-32667-4945355.pdf?src-supplier=Mouser, ComponentLink3URL=https://datasheet.ciiva.com/4945/008-0309-0-32667-4945355.pdf?src-supplier=Mouser, Contact Plating=Copper,Tin,Silver, Frequency=8MHz, Height=0.145inch, Length=0.427inch, Manufacturer Part Number 1=ATS080B-E, Mount="Through Hole", Number of pins=2, Packaging=Bulk, Pricing 1="1000=0.18120, 1200=0.17880, 2200=0.17040, 5000=0.13800, 10000=0.12150, 50000=0.10956, 100000=0.10707 (USD)", RoHS=Yes, RoHS Compliant=Yes, Series=ATS, Stock 1=4510, Supplier 1=Avnet, Supplier Part Number 1=ATS080B-E, Termination=Radial, Tolerance=30ppm, Width=0.177inch

## Free pads (board coordinates)
  round 2.4 hole 2.4 unplated: ""(-18,-25) ""(-18,25) ""(18,-25) ""(18,25)

## Via types
v1: diameter 0.6, hole 0.3, Top Layer to Bottom Layer, tented both sides, 96 vias

## Nets (pads, with @x,y where several pads share a name; then routed paths per layer and width w, separated by ;. In a path a pad name is that pad's centre, name@x,y a point inside that pad or via, vN(x,y) a via of type N, cw(c..) or ccw(c..) an arc to the next point about the centre after c; other vN are vias at no path point)
3V3: C1.1 C2.1 C14.2 C15.1 C16.1 C17.1 C18.1 C23.1 C24.2 DA5.5 JP6.5 JP8.3 R3.1 R6.1 R9.1 R12.1 R17.1 R26.1 U1.1 U1.14 U3.5 U4.5 U5.1 U5.9 U5.24 U5.36 U5.48 | length 35.7